# EAGLE board Grownetics Humidity, Temperature, & CO2 Sensor (EAGLE 7.6.0)
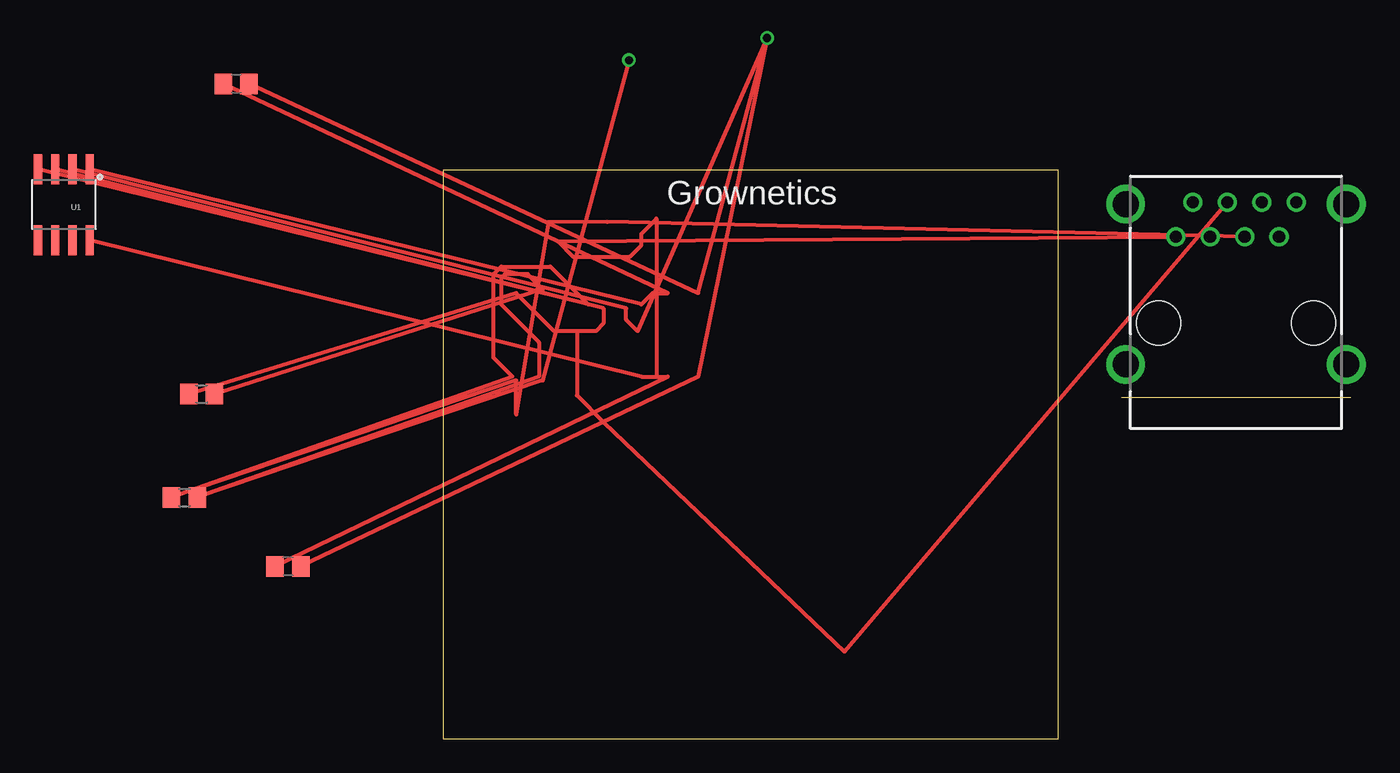
[diagram p0: board, top side]
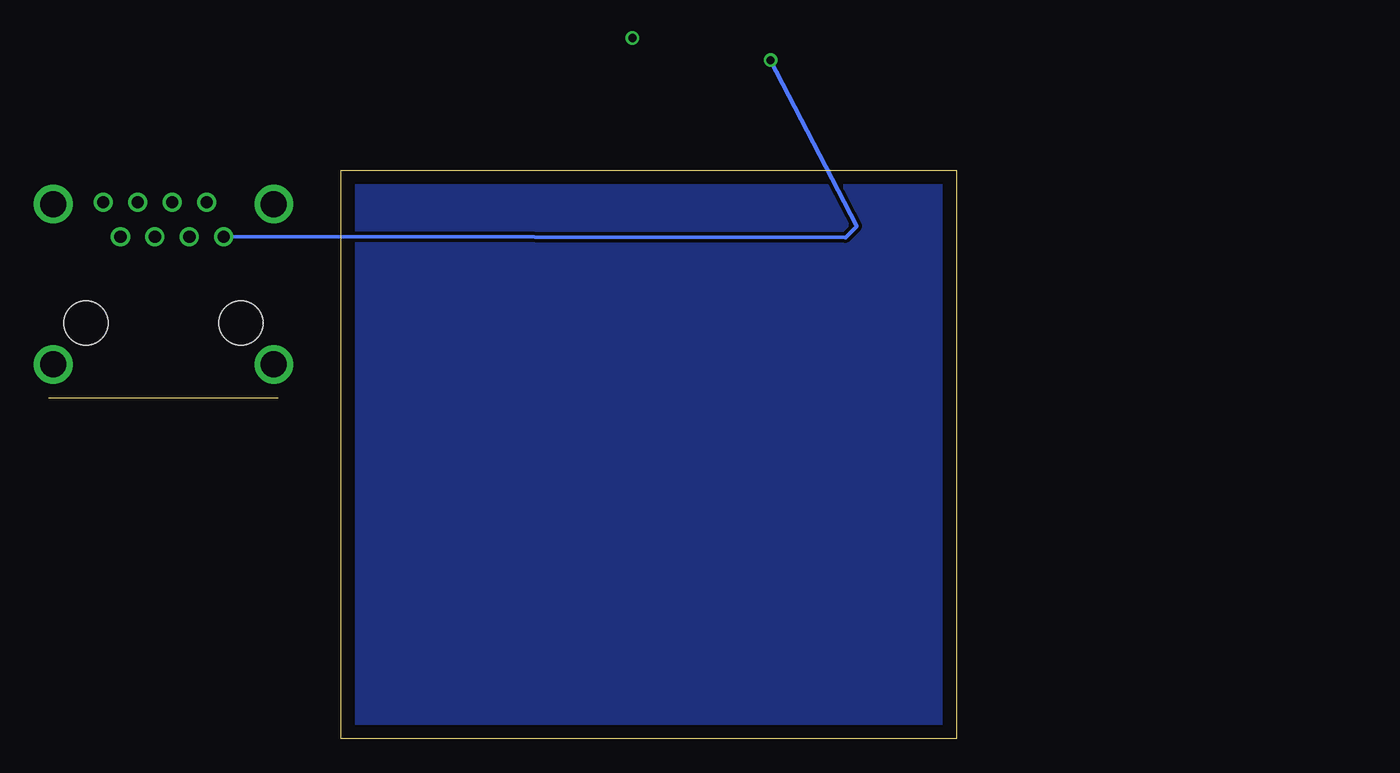
[diagram p1: board, bottom side, seen from below]

Size 66.92 x 41.9 mm. Coordinates in mm from the lower left corner, seen from the top.
Outline: 0,0 45.39,0 45.39,41.9 0,41.9 0,0
Copper layers (1*16): Top 0.035mm / dielectric 1.5mm / Bottom 0.035mm
Design rules "default": minimum track width 10mil, minimum drill 0.6mm, track to track 8mil, track to pad 8mil, pad to pad 8mil, via to via 8mil, smd to smd 8mil, copper to edge 40mil, drill to drill 8mil, minimum pad ring 10mil, minimum via ring 8mil, stop-mask expansion 4mil, vias tented up to drill 0mil, thermal gap 10mil
Net classes: 0 default: width 0.305 mm, drill 0.508 mm, clearance 0.254 mm

## Footprints (pad centres in the part's own frame; a part is rotated, then mirrored left to right if it is on the bottom)
C0805 = smd 1.3 x 1.5: 1 -0.95,0; 2 0.95,0
R0805 = smd 1.3 x 1.5: 1 -0.95,0; 2 0.95,0
SOIC8 = smd 0.61 x 2.21: 1 -1.905,-2.616; 2 -0.635,-2.616; 3 0.635,-2.616; 4 1.905,-2.616; 5 1.905,2.616; 6 0.635,2.616; 7 -0.635,2.616; 8 -1.905,2.616
RJ45-SHIELD1 = drill 0.9 pad 1.4: 1 -4.445,6.35; 2 -3.175,8.89; 3 -1.905,6.35; 4 -0.635,8.89; 5 0.635,6.35; 6 1.905,8.89; 7 3.175,6.35; 8 4.445,8.89 | drill 1.9 pad 2.5: S1 -8.128,-3.048; S2 8.128,-3.048; S3 -8.128,8.76; S4 8.128,8.76 | hole 3.251: -5.715,0; 5.715,0

## Placement (x,y rotation side)
C1  0.1uF  [C0805]  -15.24,48.26 0 top  (outside the outline)
C2  0.22uF  [C0805]  -11.43,12.7 0 top  (outside the outline)
R1  2.2k  [R0805]  -17.78,25.4 0 top  (outside the outline)
R2  2.2k  [R0805]  -19.05,17.78 0 top  (outside the outline)
U1  HIH6131  [SOIC8]  -27.94,39.37 180 top  (outside the outline)
X1  RJ45-6L21-B  [RJ45-SHIELD1]  58.47,30.64 0 top

## Library data of the parts
C1 = resistor; MPN: C0805S104K5RACAUTO; OC_NEWARK: 77Y7569
C2 = resistor; MPN: C0805X224K5RACTU; OC_NEWARK: 76Y2994
R1 R2 = resistor; MPN: SR1-0805-222; OC_NEWARK: 33C6600
U1 = SparkFun-AnalogIC; MPN: HIH6131-021-001; OC_NEWARK: 55T1170
X1 = con-tycoelectronics; MPN: RJE71-188-1401; OC_FARNELL: unknown; OC_NEWARK: 47W2082

## Nets
AL_H: U1.5
AL_L: U1.6
GND: C1.2 C2.2 U1.2 X1.2
SCL: R1.1 U1.3 X1.4
SDA: R2.1 U1.4 X1.5
VCC: C2.1 R1.2 R2.2 U1.8 X1.1
VCORE: C1.1 U1.1

## Tracks (layer width: path | path; a pad name or v marks a point on that pad's centre or on a via)
GND  (via drill 0.6)
  Top 0.305: v23.9,51.64 18.82,32.84 C1.2 | v23.9,51.64 18.82,26.7 C2.2 | v23.9,51.64 14.35,30.05 13.51,30.89 13.51,31.73 U1.2
  pour Bottom: 0,41.91 45.72,41.91 45.72,0 0,0
SCL
  Top 0.305: 9.88,30.05 11.28,30.05 11.84,30.61 11.84,31.73 U1.3 | 9.88,30.05 8.2,30.05 5.41,32.84 R1.1 | 9.88,30.05 9.88,25.3 11.84,23.34 29.62,6.43 X1.4
SDA
  Top 0.254: 12.12,38.09 7.77,38.09
  Top 0.305: 7.77,38.09 5.41,23.9 5.41,26.42 R2.1 5.13,26.7 3.73,28.09 3.73,34.24 4.29,34.8 7.92,34.8 10.72,32 U1.4 | X1.5 12.12,38.09
VCC  (via drill 0.6)
  Top 0.305: R1.2 7.37,33.12 6.25,34.24 4.57,34.24 4.29,33.96 4.29,32 7.09,29.21 7.09,26.7 R2.2 7.37,26.42 v13.72,50.01 | 15.75,26.7 14.63,26.7 U1.8 | 15.75,26.7 16.59,26.7 C2.1 | 15.75,26.7 15.75,38.33 14.63,37.21 14.63,36.37 13.79,35.54 9.6,35.54 8.48,36.65 X1.1
  Bottom 0.305: v13.72,50.01 7.37,37.77 8.2,36.93 X1.1
VCORE
  Top 0.305: C1.1 16.59,32.84 15.47,32.84 14.63,32 U1.1

## Text on the board
tPlace: Grownetics